# EAGLE board Breakouts3-Panel (EAGLE 9.6.2)
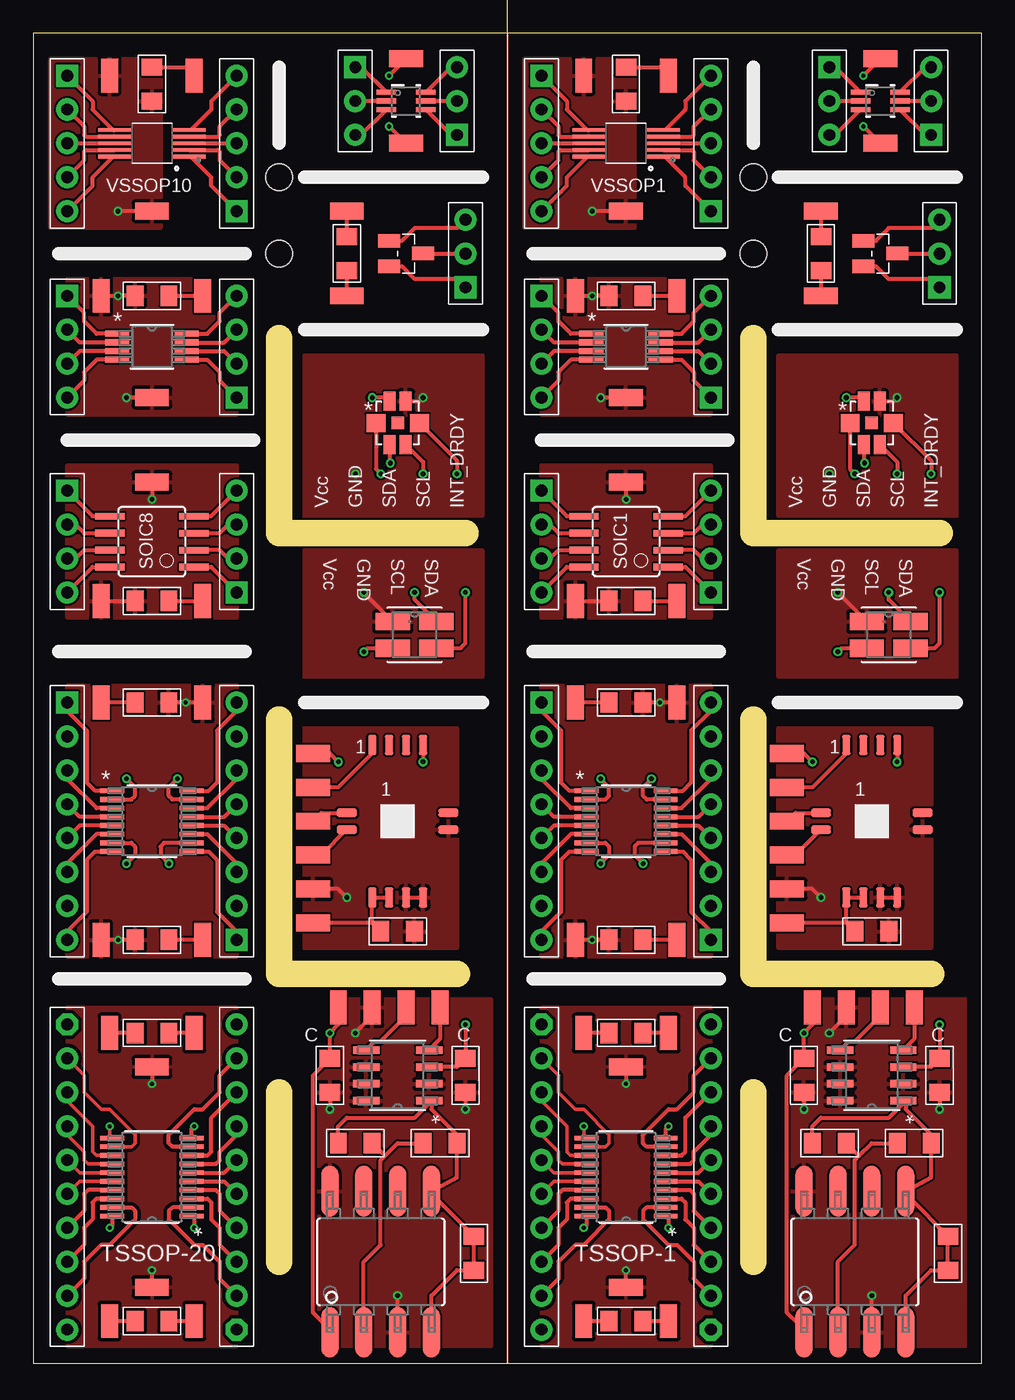
[diagram p0: board, top side]
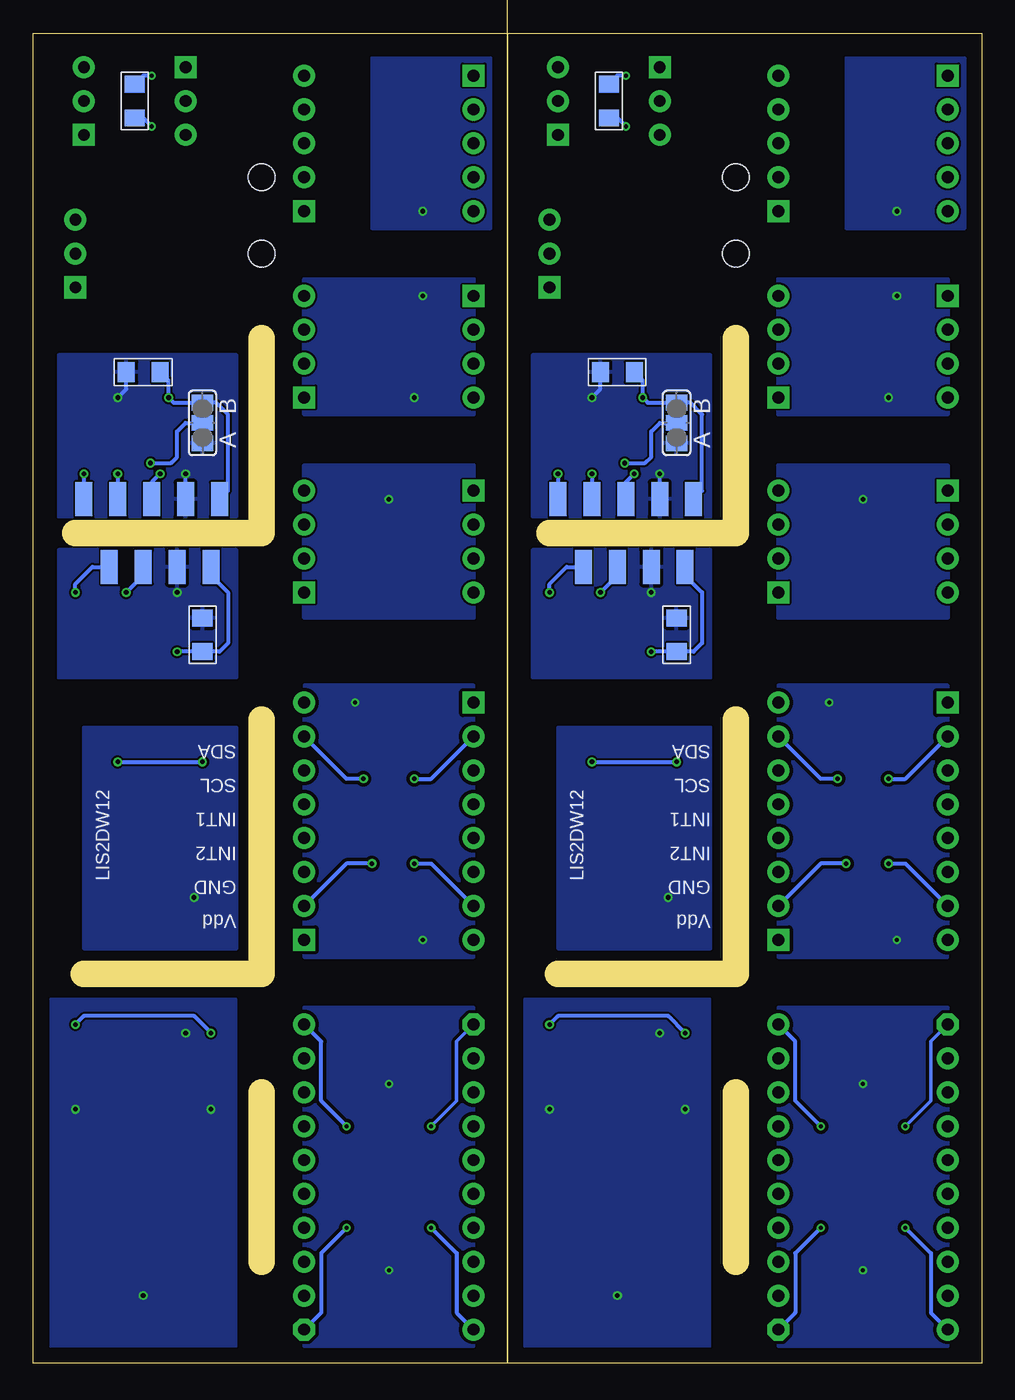
[diagram p1: board, bottom side, seen from below]

Size 71.08 x 99.69 mm. Coordinates in mm from the lower left corner, seen from the top.
Outline: 35.54,0 0,0 0,99.69 35.54,99.69
Outline: 35.54,0 35.54,99.69
Outline: 35.54,0 71.08,0 71.08,99.69 35.54,99.69
Outline: 35.54,99.69 35.54,0
Copper layers (1*16): Top 0.035mm / dielectric 1.5mm / Bottom 0.035mm
Design rules "Seeed Fusion_eagle_rule_v1.1": minimum track width 6mil, minimum drill 12mil, track to track 6mil, track to pad 6mil, pad to pad 6mil, via to via 6mil, smd to smd 0mil, copper to edge 10mil, drill to drill 10mil, minimum pad ring 10mil, minimum via ring 6mil, stop-mask expansion 2mil, vias tented up to drill 100mil, thermal gap 10mil
Holes 2 mm at 18.41,83.19 18.41,88.9 53.95,83.19 53.95,88.9
Milling: 11 lines

## Footprints (pad centres in the part's own frame; a part is rotated, then mirrored left to right if it is on the bottom)
1206 = smd 1.27 x 1.524: 1 -1.27,0; 2 1.27,0
CCLGA7_LPS28DFW_LARGE = smd 1.422 x 1.346: 1 -1.626,0; 4 1.626,0 | smd 0.889 x 1.422: 2 -0.6,-1.626; 3 0.6,-1.626; 5 0.6,1.626; 6 -0.6,1.626 | smd 0.94 x 0.94: 7 0,0
10P-2.54 = drill 0.889 pad 1.651 octagon: 1 0,11.43 | drill 0.889 pad 1.651: 2 0,8.89; 3 0,6.35; 4 0,3.81; 5 0,1.27; 6 0,-1.27; 7 0,-3.81; 8 0,-6.35; 9 0,-8.89; 10 0,-11.43
4P-1.27-SMD = smd 1.524 x 0.635: 1 0,1.905; 2 0,0.635; 3 0,-0.635; 4 0,-1.905
8P-2.54 = drill 0.889 pad 1.651 square: 1 0,8.89 | drill 0.889 pad 1.651: 2 0,6.35; 3 0,3.81; 4 0,1.27; 5 0,-1.27; 6 0,-3.81; 7 0,-6.35; 8 0,-8.89
3P-2.54 = drill 0.889 pad 1.651 square: 1 0,2.54 | drill 0.889 pad 1.651: 2 0,0; 3 0,-2.54
4P-65/35MIL = drill 0.889 pad 1.651 square: 1 0,3.81 | drill 0.889 pad 1.651: 2 0,1.27; 3 0,-1.27; 4 0,-3.81
5P-2.54 = drill 0.889 pad 1.651 square: 1 0,5.08 | drill 0.889 pad 1.651: 2 0,2.54; 3 0,0; 4 0,-2.54; 5 0,-5.08
MSOP8_MC_MCH-M = smd 1.829 x 0.457: 1 -2.603,0.975; 2 -2.603,0.325; 3 -2.603,-0.325; 4 -2.603,-0.975; 5 2.603,-0.975; 6 2.603,-0.325; 7 2.603,0.325; 8 2.603,0.975
SMD1,27-2,54 = smd 1.27 x 2.54: 1 0,0
SOT23_LONG = smd 1.016 x 1.651: 1 -0.95,-1.27; 2 0.95,-1.27; 3 0,1.27
SJ_2 = smd 1.168 x 1.6: 1 -1.524,0; 2 0,0; 3 1.524,0
SOIC8 = smd 0.5 x 2.2: 1 -1.905,-3.154; 2 -0.645,-3.154; 3 0.625,-3.154; 4 1.895,-3.154; 5 1.905,3.154; 6 0.635,3.154; 7 -0.635,3.154; 8 -1.905,3.154
PW20-M = smd 1.778 x 0.356: 1 -2.972,2.925; 2 -2.972,2.275; 3 -2.972,1.625; 4 -2.972,0.975; 5 -2.972,0.325; 6 -2.972,-0.325; 7 -2.972,-0.975; 8 -2.972,-1.625; 9 -2.972,-2.275; 10 -2.972,-2.925; 11 2.972,-2.925; 12 2.972,-2.275; 13 2.972,-1.625; 14 2.972,-0.975; 15 2.972,-0.325; 16 2.972,0.325; 17 2.972,0.975; 18 2.972,1.625; 19 2.972,2.275; 20 2.972,2.925
SOT403-1_NXP-M = smd 1.778 x 0.356: 1 -2.972,2.275; 2 -2.972,1.625; 3 -2.972,0.975; 4 -2.972,0.325; 5 -2.972,-0.325; 6 -2.972,-0.975; 7 -2.972,-1.625; 8 -2.972,-2.275; 9 2.972,-2.275; 10 2.972,-1.625; 11 2.972,-0.975; 12 2.972,-0.325; 13 2.972,0.325; 14 2.972,0.975; 15 2.972,1.625; 16 2.972,2.275
MS5837-02BA01_LARGE = smd 2.565 x 1.295: 1 -1.635,1; 2 -1.635,-1; 3 1.635,-1; 4 1.635,1
DRV0006B-LARGE = smd 1.466 x 0.381: 1 -1.483,0.65; 2 -1.483,0; 3 -1.483,-0.65; 4 1.483,-0.65; 5 1.483,0; 6 1.483,0.65
DTL0008A_LARGE = smd 3.81 x 1.27: 1 -5.283,3.81; 2 -5.283,1.27; 3 -5.283,-1.27; 4 -5.283,-3.81; 5 5.283,-3.81; 6 5.283,-1.27; 7 5.283,1.27; 8 5.283,3.81
SOIC8-N_MC_MCH = smd 1.981 x 0.559: 1 -2.362,1.905; 2 -2.362,0.635; 3 -2.362,-0.635; 4 -2.362,-1.905; 5 2.362,-1.905; 6 2.362,-0.635; 7 2.362,0.635; 8 2.362,1.905
2P-1.27-SMD = smd 1.524 x 0.635: 1 0,0.635; 2 0,-0.635
SOP50P490X110-10N = smd 2.54 x 0.28: 1 -2.794,1; 2 -2.794,0.5; 3 -2.794,0; 4 -2.794,-0.5; 5 -2.794,-1; 6 2.794,-1; 7 2.794,-0.5; 8 2.794,0; 9 2.794,0.5; 10 2.794,1

## Placement (x,y rotation side)
C1  [1206]  27.3,32.38 180 top
C2  [1206]  22.86,54.61 270 bottom
C3  [1206]  8.89,24.77 0 top
C4  [1206]  8.89,3.17 0 top
C5  [1206]  32.38,21.59 270 top
C6  [1206]  27.94,94.61 90 bottom
C7  [1206]  8.89,31.75 0 top
C8  [1206]  8.89,49.53 0 top
C9  [1206]  22.23,21.59 270 top
C10  [1206]  24.13,16.51 0 top
C11  [1206]  8.89,57.15 0 top
C12  [1206]  8.89,80.01 0 top
C13  [1206]  8.89,95.89 90 top
C14  [1206]  27.3,74.3 0 bottom
C15  [1206]  62.84,32.38 180 top
C16  [1206]  58.4,54.61 270 bottom
C17  [1206]  44.43,24.77 0 top
C18  [1206]  44.43,3.17 0 top
C19  [1206]  67.92,21.59 270 top
C20  [1206]  63.48,94.61 90 bottom
C21  [1206]  44.43,31.75 0 top
C22  [1206]  44.43,49.53 0 top
C23  [1206]  57.76,21.59 270 top
C24  [1206]  59.67,16.51 0 top
C25  [1206]  44.43,57.15 0 top
C26  [1206]  44.43,80.01 0 top
C27  [1206]  62.84,74.3 0 bottom
C28  [1206]  44.43,95.89 90 top
CLGA-1  LPS28DFW  [CCLGA7_LPS28DFW_LARGE]  62.84,70.48 0 top
CLGA-7  LPS28DFW  [CCLGA7_LPS28DFW_LARGE]  27.3,70.48 0 top
J1  [10P-2.54]  15.24,13.97 180 top
J2  [10P-2.54]  2.54,13.97 0 top
J3  [4P-1.27-SMD]  27.3,46.35 90 top
J4  [4P-1.27-SMD]  27.3,34.92 270 top
J5  [8P-2.54]  15.24,40.64 180 top
J6  [8P-2.54]  2.54,40.64 0 top
J7  [3P-2.54]  31.75,94.61 180 top
J8  [3P-2.54]  24.13,94.61 0 top
J9  [4P-65/35MIL]  2.54,61.59 0 top
J10  [4P-65/35MIL]  15.24,61.59 180 top
J11  [4P-65/35MIL]  15.24,76.2 180 top
J12  [4P-65/35MIL]  2.54,76.2 0 top
J13  [3P-2.54]  32.38,83.19 180 top
J14  [5P-2.54]  15.24,91.44 180 top
J15  [5P-2.54]  2.54,91.44 0 top
J16  [10P-2.54]  50.78,13.97 180 top
J17  [10P-2.54]  38.08,13.97 0 top
J18  [4P-1.27-SMD]  62.84,46.35 90 top
J19  [4P-1.27-SMD]  62.84,34.92 270 top
J20  [8P-2.54]  50.78,40.64 180 top
J21  [8P-2.54]  38.08,40.64 0 top
J22  [3P-2.54]  67.29,94.61 180 top
J23  [3P-2.54]  59.67,94.61 0 top
J24  [4P-65/35MIL]  38.08,61.59 0 top
J25  [4P-65/35MIL]  50.78,61.59 180 top
J26  [4P-65/35MIL]  50.78,76.2 180 top
J27  [4P-65/35MIL]  38.08,76.2 0 top
J28  [3P-2.54]  67.92,83.19 180 top
J29  [5P-2.54]  50.78,91.44 180 top
J30  [5P-2.54]  38.08,91.44 0 top
MSOP1  MCP4532-104E/MSMSOP8_MC_MCH-M  [MSOP8_MC_MCH-M]  44.43,76.2 0 top
MSOP8  MCP4532-104E/MSMSOP8_MC_MCH-M  [MSOP8_MC_MCH-M]  8.89,76.2 0 top
PAD1  WIREPADSMD1,27-254  [SMD1,27-2,54]  20.95,35.56 90 top
PAD2  WIREPADSMD1,27-254  [SMD1,27-2,54]  20.95,33.02 90 top
PAD3  WIREPADSMD1,27-254  [SMD1,27-2,54]  20.95,43.18 90 top
PAD4  WIREPADSMD1,27-254  [SMD1,27-2,54]  20.95,38.1 90 top
PAD5  WIREPADSMD1,27-254  [SMD1,27-2,54]  20.95,40.64 90 top
PAD6  WIREPADSMD1,27-254  [SMD1,27-2,54]  20.95,45.72 90 top
PAD7  WIREPADSMD1,27-254  [SMD1,27-2,54]  24.77,59.69 180 bottom
PAD8  WIREPADSMD1,27-254  [SMD1,27-2,54]  22.23,59.69 180 bottom
PAD9  WIREPADSMD1,27-254  [SMD1,27-2,54]  27.3,59.69 180 bottom
PAD10  WIREPADSMD1,27-254  [SMD1,27-2,54]  29.84,59.69 180 bottom
PAD11  WIREPADSMD1,27-254  [SMD1,27-2,54]  5.71,24.77 0 top
PAD12  WIREPADSMD1,27-254  [SMD1,27-2,54]  5.71,3.17 0 top
PAD13  WIREPADSMD1,27-254  [SMD1,27-2,54]  12.06,24.77 0 top
PAD14  WIREPADSMD1,27-254  [SMD1,27-2,54]  12.06,3.17 0 top
PAD15  WIREPADSMD1,27-254  [SMD1,27-2,54]  8.89,5.71 90 top
PAD16  WIREPADSMD1,27-254  [SMD1,27-2,54]  8.89,22.23 90 top
PAD17  WIREPADSMD1,27-254  [SMD1,27-2,54]  27.94,91.44 90 top
PAD18  WIREPADSMD1,27-254  [SMD1,27-2,54]  27.94,97.79 90 top
PAD19  WIREPADSMD1,27-254  [SMD1,27-2,54]  5.08,49.53 180 top
PAD20  WIREPADSMD1,27-254  [SMD1,27-2,54]  5.08,31.75 180 top
PAD21  WIREPADSMD1,27-254  [SMD1,27-2,54]  12.7,49.53 180 top
PAD22  WIREPADSMD1,27-254  [SMD1,27-2,54]  12.7,31.75 180 top
PAD23  WIREPADSMD1,27-254  [SMD1,27-2,54]  22.86,26.67 0 top
PAD24  WIREPADSMD1,27-254  [SMD1,27-2,54]  25.4,26.67 0 top
PAD25  WIREPADSMD1,27-254  [SMD1,27-2,54]  27.94,26.67 0 top
PAD26  WIREPADSMD1,27-254  [SMD1,27-2,54]  30.48,26.67 0 top
PAD27  WIREPADSMD1,27-254  [SMD1,27-2,54]  5.08,57.15 180 top
PAD28  WIREPADSMD1,27-254  [SMD1,27-2,54]  12.7,57.15 180 top
PAD29  WIREPADSMD1,27-254  [SMD1,27-2,54]  8.89,66.04 90 top
PAD30  WIREPADSMD1,27-254  [SMD1,27-2,54]  12.7,80.01 0 top
PAD31  WIREPADSMD1,27-254  [SMD1,27-2,54]  5.08,80.01 0 top
PAD32  WIREPADSMD1,27-254  [SMD1,27-2,54]  8.89,72.39 90 top
PAD33  WIREPADSMD1,27-254  [SMD1,27-2,54]  23.5,80.01 90 top
PAD34  WIREPADSMD1,27-254  [SMD1,27-2,54]  26.67,64.77 0 bottom
PAD35  WIREPADSMD1,27-254  [SMD1,27-2,54]  29.21,64.77 0 bottom
PAD36  WIREPADSMD1,27-254  [SMD1,27-2,54]  31.75,64.77 0 bottom
PAD37  WIREPADSMD1,27-254  [SMD1,27-2,54]  24.13,64.77 0 bottom
PAD38  WIREPADSMD1,27-254  [SMD1,27-2,54]  21.59,64.77 0 bottom
PAD39  WIREPADSMD1,27-254  [SMD1,27-2,54]  23.5,86.36 90 top
PAD40  WIREPADSMD1,27-254  [SMD1,27-2,54]  12.06,96.52 0 top
PAD41  WIREPADSMD1,27-254  [SMD1,27-2,54]  5.71,96.52 0 top
PAD42  WIREPADSMD1,27-254  [SMD1,27-2,54]  8.89,86.36 90 top
PAD43  WIREPADSMD1,27-254  [SMD1,27-2,54]  56.49,35.56 90 top
PAD44  WIREPADSMD1,27-254  [SMD1,27-2,54]  56.49,33.02 90 top
PAD45  WIREPADSMD1,27-254  [SMD1,27-2,54]  56.49,43.18 90 top
PAD46  WIREPADSMD1,27-254  [SMD1,27-2,54]  56.49,38.1 90 top
PAD47  WIREPADSMD1,27-254  [SMD1,27-2,54]  56.49,40.64 90 top
PAD48  WIREPADSMD1,27-254  [SMD1,27-2,54]  56.49,45.72 90 top
PAD49  WIREPADSMD1,27-254  [SMD1,27-2,54]  60.3,59.69 180 bottom
PAD50  WIREPADSMD1,27-254  [SMD1,27-2,54]  57.76,59.69 180 bottom
PAD51  WIREPADSMD1,27-254  [SMD1,27-2,54]  62.84,59.69 180 bottom
PAD52  WIREPADSMD1,27-254  [SMD1,27-2,54]  65.38,59.69 180 bottom
PAD53  WIREPADSMD1,27-254  [SMD1,27-2,54]  41.25,24.77 0 top
PAD54  WIREPADSMD1,27-254  [SMD1,27-2,54]  41.25,3.17 0 top
PAD55  WIREPADSMD1,27-254  [SMD1,27-2,54]  47.6,24.77 0 top
PAD56  WIREPADSMD1,27-254  [SMD1,27-2,54]  47.6,3.17 0 top
PAD57  WIREPADSMD1,27-254  [SMD1,27-2,54]  44.43,5.71 90 top
PAD58  WIREPADSMD1,27-254  [SMD1,27-2,54]  44.43,22.23 90 top
PAD59  WIREPADSMD1,27-254  [SMD1,27-2,54]  63.48,91.44 90 top
PAD60  WIREPADSMD1,27-254  [SMD1,27-2,54]  63.48,97.79 90 top
PAD61  WIREPADSMD1,27-254  [SMD1,27-2,54]  40.62,49.53 180 top
PAD62  WIREPADSMD1,27-254  [SMD1,27-2,54]  40.62,31.75 180 top
PAD63  WIREPADSMD1,27-254  [SMD1,27-2,54]  48.24,49.53 180 top
PAD64  WIREPADSMD1,27-254  [SMD1,27-2,54]  48.24,31.75 180 top
PAD65  WIREPADSMD1,27-254  [SMD1,27-2,54]  58.4,26.67 0 top
PAD66  WIREPADSMD1,27-254  [SMD1,27-2,54]  60.94,26.67 0 top
PAD67  WIREPADSMD1,27-254  [SMD1,27-2,54]  63.48,26.67 0 top
PAD68  WIREPADSMD1,27-254  [SMD1,27-2,54]  66.02,26.67 0 top
PAD69  WIREPADSMD1,27-254  [SMD1,27-2,54]  40.62,57.15 180 top
PAD70  WIREPADSMD1,27-254  [SMD1,27-2,54]  48.24,57.15 180 top
PAD71  WIREPADSMD1,27-254  [SMD1,27-2,54]  44.43,66.04 90 top
PAD72  WIREPADSMD1,27-254  [SMD1,27-2,54]  48.24,80.01 0 top
PAD73  WIREPADSMD1,27-254  [SMD1,27-2,54]  40.62,80.01 0 top
PAD74  WIREPADSMD1,27-254  [SMD1,27-2,54]  44.43,72.39 90 top
PAD75  WIREPADSMD1,27-254  [SMD1,27-2,54]  62.21,64.77 0 bottom
PAD76  WIREPADSMD1,27-254  [SMD1,27-2,54]  64.75,64.77 0 bottom
PAD77  WIREPADSMD1,27-254  [SMD1,27-2,54]  67.29,64.77 0 bottom
PAD78  WIREPADSMD1,27-254  [SMD1,27-2,54]  59.67,64.77 0 bottom
PAD79  WIREPADSMD1,27-254  [SMD1,27-2,54]  57.13,64.77 0 bottom
PAD80  WIREPADSMD1,27-254  [SMD1,27-2,54]  59.03,80.01 90 top
PAD81  WIREPADSMD1,27-254  [SMD1,27-2,54]  59.03,86.36 90 top
PAD82  WIREPADSMD1,27-254  [SMD1,27-2,54]  47.6,96.52 0 top
PAD83  WIREPADSMD1,27-254  [SMD1,27-2,54]  41.25,96.52 0 top
PAD84  WIREPADSMD1,27-254  [SMD1,27-2,54]  44.43,86.36 90 top
Q1  [SOT23_LONG]  27.94,83.19 270 top
Q2  [SOT23_LONG]  63.48,83.19 270 top
R1  [1206]  30.48,16.51 180 top
R2  [1206]  33.02,8.26 270 top
R3  [1206]  23.5,83.19 90 top
R4  [1206]  66.02,16.51 180 top
R5  [1206]  68.56,8.26 270 top
R6  [1206]  59.03,83.19 90 top
SJ1  [SJ_2]  22.86,70.48 90 bottom
SJ2  [SJ_2]  58.4,70.48 90 bottom
SOIC1  TINY10S  [SOIC8]  44.43,61.59 90 top
SOIC8  TINY10S  [SOIC8]  8.89,61.59 90 top
TSSOP-1  SN74ACT245PWRPW20-M  [PW20-M]  44.43,13.97 180 top
TSSOP-2  SC18IM704PWJSOT403-1_NXP-M  [SOT403-1_NXP-M]  44.43,40.64 0 top
TSSOP-16  SC18IM704PWJSOT403-1_NXP-M  [SOT403-1_NXP-M]  8.89,40.64 0 top
TSSOP-20  SN74ACT245PWRPW20-M  [PW20-M]  8.89,13.97 180 top
U1  MS5837  [MS5837-02BA01_LARGE]  28.57,54.61 0 top
U2  TMP117AIDRVRLARGE  [DRV0006B-LARGE]  27.94,94.61 0 top
U3  OPT101  [DTL0008A_LARGE]  26.04,7.62 90 top
U4  MCP3426  [SOIC8-N_MC_MCH]  27.3,21.59 180 top
U5  MS5837  [MS5837-02BA01_LARGE]  64.11,54.61 0 top
U6  TMP117AIDRVRLARGE  [DRV0006B-LARGE]  63.48,94.61 0 top
U7  OPT101  [DTL0008A_LARGE]  61.57,7.62 90 top
U8  MCP3426  [SOIC8-N_MC_MCH]  62.84,21.59 180 top
U$1  HEADER-2P  [2P-1.27-SMD]  31.11,40.64 0 top
U$2  HEADER-2P  [2P-1.27-SMD]  23.5,40.64 180 top
U$3  HEADER-2P  [2P-1.27-SMD]  66.65,40.64 0 top
U$4  HEADER-2P  [2P-1.27-SMD]  59.03,40.64 180 top
VSSOP1  FDC1004DGSR  [SOP50P490X110-10N]  44.43,91.44 180 top
VSSOP10  FDC1004DGSR  [SOP50P490X110-10N]  8.89,91.44 180 top

## Library data of the parts
C1-C28 PAD1-PAD84 Q1 Q2 R1-R6 SJ1 SJ2 = Master 2016
CLGA-1 CLGA-7 J3 J4 J18 J19 U1 U2 U5 U6 U$1-U$4 = SMD Breakouts
J1 J2 J5-J17 J20-J30 = Connector
MSOP1 MSOP8 = SMD Breakouts; COPYRIGHT: Copyright (C) 2025 Ultra Librarian. All rights reserved.; MANUFACTURER_PART_NUMBER: MCP4532-104E/MS; MFR_NAME: Microchip
SOIC1 SOIC8 = atmel; OC_FARNELL: unknown; OC_NEWARK: unknown
TSSOP-1 TSSOP-20 = SMD Breakouts; COPYRIGHT: Copyright (C) 2025 Ultra Librarian. All rights reserved.; MANUFACTURER_PART_NUMBER: SN74ACT245PWR; MFR_NAME: Texas Instruments
TSSOP-2 TSSOP-16 = SMD Breakouts; COPYRIGHT: Copyright (C) 2025 Ultra Librarian. All rights reserved.; MANUFACTURER_PART_NUMBER: SC18IM704PWJ; MFR_NAME: NXP
U3 U7 VSSOP1 VSSOP10 = ESP32 Projects
U4 U8 = ESP32 Projects; COPYRIGHT: Copyright (C) 2025 Ultra Librarian. All rights reserved.; MANUFACTURER_PART_NUMBER: MCP3426A0T-E/SN; MFR_NAME: Microchip

## Nets
AGND: PAD15.1 PAD16.1
AGND1: PAD57.1 PAD58.1
B1: J3.1 PAD3.1
B2: J3.2
B3: J3.3
B4: J3.4 PAD6.1
B5: U$1.1
B6: C1.1 J4.1 J4.2 PAD1.1 U$1.2
B7: C15.2 J19.3 J19.4 PAD44.1
B8: U$3.1
B9: C1.2 J4.3 J4.4 PAD2.1
B10: J18.1 PAD45.1
B11: PAD4.1 U$2.1
B12: PAD5.1 U$2.2
B13: J18.3
B14: C15.1 J19.1 J19.2 PAD43.1 U$3.2
B15: J18.4 PAD48.1
B16: PAD46.1 U$4.1
B17: PAD47.1 U$4.2
B18: J18.2
CGND: C2.1 PAD7.1 U1.1
CGND1: C16.1 PAD49.1 U5.1
D1: J8.1 U2.1
D2: J8.2 U2.2
D3: J8.3 U2.3
D4: J7.1 U2.4
D5: J7.2 U2.5
D6: J7.3 U2.6
D7: J22.2 U6.5
D8: J22.3 U6.6
D9: J23.1 U6.1
D10: J23.3 U6.3
D11: J22.1 U6.4
D12: J23.2 U6.2
EGND: C5.2 C9.2 PAD24.1 U3.3 U3.8 U4.2 U4.6 U4.7 U4.8
EGND1: C19.2 C23.2 PAD66.1 U7.3 U7.8 U8.2 U8.6 U8.7 U8.8
ESCL: PAD25.1 U4.5
ESCL1: PAD67.1 U8.5
ESDA: PAD26.1 U4.4
ESDA1: PAD68.1 U8.4
EV+: C5.1 C9.1 PAD23.1 U3.1 U4.3
EV+1: C19.1 C23.1 PAD65.1 U7.1 U8.3
FGND: C7.1 C8.2 PAD20.1 PAD21.1
FGND1: C21.1 C22.2 PAD62.1 PAD63.1
G1: J10.1 SOIC8.1
G2: J10.2 SOIC8.2
G3: J10.3 SOIC8.3
G4: J10.4 SOIC8.4
G5: J9.1 SOIC8.5
G6: J9.2 SOIC8.6
G7: J9.3 SOIC8.7
G8: J9.4 SOIC8.8
G9: J24.4 SOIC1.8
G10: J25.4 SOIC1.4
G11: J25.1 SOIC1.1
G12: J25.3 SOIC1.3
G13: J25.2 SOIC1.2
G14: J24.3 SOIC1.7
G15: J24.2 SOIC1.6
G16: J24.1 SOIC1.5
GGND: C11.1 PAD27.1 PAD29.1
GGND1: C25.1 PAD69.1 PAD71.1
HGND: C12.1 PAD31.1 PAD32.1
HGND1: C26.1 PAD73.1 PAD74.1
I1: CLGA-7.1 PAD34.1
I2: CLGA-7.2 SJ1.2
I3: CLGA-7.3 PAD35.1
I4: CLGA-7.4 PAD36.1
I5: CLGA-1.1 PAD75.1
I6: C14.2 CLGA-7.6 PAD38.1 SJ1.3
I7: CLGA-1.2 SJ2.2
I8: CLGA-1.3 PAD76.1
I9: CLGA-1.4 PAD77.1
I10: C27.2 CLGA-1.6 PAD79.1 SJ2.3
IGND: C14.1 CLGA-7.5 PAD37.1 SJ1.1
IGND1: C27.1 CLGA-1.5 PAD78.1 SJ2.1
J1: J14.1 VSSOP10.1
J2: J14.2 VSSOP10.2
J3: J14.3 VSSOP10.3
J4: J14.4 VSSOP10.4
J5: J14.5 VSSOP10.5
J6: J15.1 VSSOP10.6
J7: J15.2 VSSOP10.7
J8: J15.3 VSSOP10.8
J9: J15.4 VSSOP10.9
J10: J15.5 VSSOP10.10
J11: J30.1 VSSOP1.6
J12: J30.2 VSSOP1.7
J13: J30.3 VSSOP1.8
J14: J30.4 VSSOP1.9
J15: J30.5 VSSOP1.10
J16: J29.5 VSSOP1.5
J17: J29.4 VSSOP1.4
J18: J29.3 VSSOP1.3
J19: J29.2 VSSOP1.2
J20: J29.1 VSSOP1.1
JGND: C13.1 PAD41.1 PAD42.1
JGND1: C28.1 PAD83.1 PAD84.1
N$1: J1.1 TSSOP-20.1
N$2: C2.2 PAD8.1 U1.2
N$3: PAD9.1 U1.4
N$4: PAD10.1 U1.3
N$5: J1.2 TSSOP-20.2
N$6: J1.3 TSSOP-20.3
N$7: J1.4 TSSOP-20.4
N$8: J1.5 TSSOP-20.5
N$9: J1.6 TSSOP-20.6
N$10: J1.7 TSSOP-20.7
N$11: J1.8 TSSOP-20.8
N$12: J1.9 TSSOP-20.9
N$13: J1.10 TSSOP-20.10
N$14: J2.10 TSSOP-20.20
N$15: J2.9 TSSOP-20.19
N$16: J2.8 TSSOP-20.18
N$17: J2.7 TSSOP-20.17
N$18: J2.6 TSSOP-20.16
N$19: J2.5 TSSOP-20.15
N$20: J2.4 TSSOP-20.14
N$21: J2.3 TSSOP-20.13
N$22: J2.2 TSSOP-20.12
N$23: J2.1 TSSOP-20.11
N$24: C3.1 PAD11.1
N$25: C3.2 PAD13.1
N$26: C4.1 PAD12.1
N$27: C4.2 PAD14.1
N$28: C6.1 PAD17.1
N$29: C6.2 PAD18.1
N$30: C7.2 PAD22.1
N$31: PAD33.1 R3.1
N$32: C10.1 R1.1 R2.1 R2.2 U3.4 U3.5 U4.1
N$33: C8.1 PAD19.1
N$34: J6.1 TSSOP-16.1
N$35: J6.2 TSSOP-16.2
N$36: J6.3 TSSOP-16.3
N$37: J6.4 TSSOP-16.4
N$38: J6.5 TSSOP-16.5
N$39: J6.6 TSSOP-16.6
N$40: J6.7 TSSOP-16.7
N$41: J6.8 TSSOP-16.8
N$42: J5.8 TSSOP-16.16
N$43: J5.7 TSSOP-16.15
N$44: J5.6 TSSOP-16.14
N$45: J5.5 TSSOP-16.13
N$46: J5.4 TSSOP-16.12
N$47: J5.3 TSSOP-16.11
N$48: J5.2 TSSOP-16.10
N$49: J5.1 TSSOP-16.9
N$50: C10.2 R1.2 U3.2
N$51: C11.2 PAD28.1
N$52: J12.1 MSOP8.1
N$53: J12.2 MSOP8.2
N$54: J12.3 MSOP8.3
N$55: J12.4 MSOP8.4
N$56: J11.4 MSOP8.8
N$57: J11.3 MSOP8.7
N$58: J11.2 MSOP8.6
N$59: J11.1 MSOP8.5
N$60: PAD39.1 R3.2
N$61: C12.2 PAD30.1
N$62: J13.3 Q1.1
N$63: J13.2 Q1.3
N$64: J13.1 Q1.2
N$65: C16.2 PAD50.1 U5.2
N$66: C13.2 PAD40.1
N$67: PAD51.1 U5.4
N$68: PAD52.1 U5.3
N$69: J16.1 TSSOP-1.1
N$70: J16.2 TSSOP-1.2
N$71: J16.3 TSSOP-1.3
N$72: J16.4 TSSOP-1.4
N$73: J16.5 TSSOP-1.5
N$74: J16.6 TSSOP-1.6
N$75: J16.7 TSSOP-1.7
N$76: J16.8 TSSOP-1.8
N$77: J16.9 TSSOP-1.9
N$78: J16.10 TSSOP-1.10
N$79: J17.10 TSSOP-1.20
N$80: J17.9 TSSOP-1.19
N$81: J17.8 TSSOP-1.18
N$82: J17.7 TSSOP-1.17
N$83: J17.6 TSSOP-1.16
N$84: J17.5 TSSOP-1.15
N$85: J17.4 TSSOP-1.14
N$86: J17.3 TSSOP-1.13
N$87: J17.2 TSSOP-1.12
N$88: J17.1 TSSOP-1.11
N$89: C17.1 PAD53.1
N$90: C17.2 PAD55.1
N$91: C18.1 PAD54.1
N$92: C18.2 PAD56.1
N$93: C20.1 PAD59.1
N$94: C20.2 PAD60.1
N$95: C21.2 PAD64.1
N$96: C22.1 PAD61.1
N$97: J21.1 TSSOP-2.1
N$98: J21.2 TSSOP-2.2
N$99: J21.3 TSSOP-2.3
N$100: J21.4 TSSOP-2.4
N$101: J21.5 TSSOP-2.5
N$102: J21.6 TSSOP-2.6
N$103: J21.7 TSSOP-2.7
N$104: J21.8 TSSOP-2.8
N$105: J20.8 TSSOP-2.16
N$106: J20.7 TSSOP-2.15
N$107: J20.6 TSSOP-2.14
N$108: J20.5 TSSOP-2.13
N$109: J20.4 TSSOP-2.12
N$110: J20.3 TSSOP-2.11
N$111: J20.2 TSSOP-2.10
N$112: J20.1 TSSOP-2.9
N$113: C24.1 R4.1 R5.1 R5.2 U7.4 U7.5 U8.1
N$114: C24.2 R4.2 U7.2
N$115: C25.2 PAD70.1
N$116: J27.1 MSOP1.1
N$117: J27.2 MSOP1.2
N$118: J27.3 MSOP1.3
N$119: J27.4 MSOP1.4
N$120: J26.4 MSOP1.8
N$121: J26.3 MSOP1.7
N$122: J26.2 MSOP1.6
N$123: J26.1 MSOP1.5
N$124: C26.2 PAD72.1
N$125: PAD80.1 R6.1
N$126: PAD81.1 R6.2
N$127: J28.1 Q2.2
N$128: J28.3 Q2.1
N$129: J28.2 Q2.3
N$130: C28.2 PAD82.1

## Tracks (layer width: path | path; a pad name or v marks a point on that pad's centre or on a via)
AGND  (via drill 0.3 pad 0.61)
  Top 0.305: PAD15.1 v8.89,6.99 | PAD16.1 v8.89,20.95
  pour Bottom (isolate 0.254): 2.54,26.67 15.24,26.67 15.24,1.27 2.54,1.27
  pour Top (isolate 0.254): 2.54,26.67 2.54,1.27 15.24,1.27 15.24,26.67
AGND1  (via drill 0.3 pad 0.61)
  Top 0.305: PAD57.1 v44.43,6.99 | PAD58.1 v44.43,20.95
  pour Bottom (isolate 0.254): 38.08,26.67 50.78,26.67 50.78,1.27 38.08,1.27
  pour Top (isolate 0.254): 38.08,26.67 38.08,1.27 50.78,1.27 50.78,26.67
B1
  Top 0.305: J3.1 25.4,45.72 22.86,43.18 PAD3.1
B4  (via drill 0.35)
  Top 0.305: J3.4 v29.21,45.09 | v22.86,45.09 22.23,45.72 PAD6.1
  Bottom 0.305: v29.21,45.09 v22.86,45.09
B6  (via drill 0.35)
  Top 0.305: J4.2 J4.1 | v23.5,34.92 22.86,35.56 PAD1.1
  pour Bottom: 20.32,47.62 31.75,47.62 31.75,31.11 20.32,31.11
  pour Top: 20.32,47.62 31.75,47.62 31.75,31.11 20.32,31.11
B7
  Top 0.305: J19.3 J19.4 60.94,33.02 | 60.94,33.02 PAD44.1 | C15.2 60.94,33.02
B9
  Top 0.305: J4.3 J4.4 25.4,33.02 | 25.4,33.02 PAD2.1 | C1.2 25.4,33.02
B10
  Top 0.305: J18.1 60.94,45.72 58.4,43.18 PAD45.1
B11
  Top 0.305: PAD4.1 21.59,38.1 U$2.1
B12
  Top 0.305: PAD5.1 21.59,41.27 U$2.2
B14  (via drill 0.35)
  Top 0.305: J19.2 J19.1 | v59.03,34.92 58.4,35.56 PAD43.1
  pour Bottom: 55.86,47.62 67.29,47.62 67.29,31.11 55.86,31.11
  pour Top: 55.86,47.62 67.29,47.62 67.29,31.11 55.86,31.11
B15  (via drill 0.35)
  Top 0.305: J18.4 v64.75,45.09 | v58.4,45.09 57.77,45.72 PAD48.1
  Bottom 0.305: v64.75,45.09 v58.4,45.09
B16
  Top 0.305: PAD46.1 57.13,38.1 U$4.1
B17
  Top 0.305: PAD47.1 57.13,41.27 U$4.2
CGND  (via drill 0.35)
  Top 0.305: v24.77,57.78 U1.1
  pour Bottom: 33.66,60.96 33.66,51.44 20.32,51.44 20.32,60.96
  pour Top: 33.66,60.96 33.66,51.44 20.32,51.44 20.32,60.96
CGND1  (via drill 0.35)
  Top 0.305: v60.3,57.78 U5.1
  pour Bottom: 69.19,60.96 69.19,51.44 55.86,51.44 55.86,60.96
  pour Top: 69.19,60.96 69.19,51.44 55.86,51.44 55.86,60.96
D1
  Top 0.305: U2.1 24.57,97.16 J8.1
D2
  Top 0.305: U2.2 J8.2
D3
  Top 0.305: U2.3 24.57,92.08 J8.3
D4
  Top 0.305: U2.4 31.31,92.08 J7.1
D5
  Top 0.305: J7.2 U2.5
D6
  Top 0.305: U2.6 31.31,97.16 J7.3
D7
  Top 0.305: J22.2 U6.5
D8
  Top 0.305: U6.6 66.85,97.16 J22.3
D9
  Top 0.305: U6.1 60.11,97.16 J23.1
D10
  Top 0.305: U6.3 60.11,92.08 J23.3
D11
  Top 0.305: U6.4 66.85,92.08 J22.1
D12
  Top 0.305: U6.2 J23.2
EGND  (via drill 0.35)
  Top 0.305: C5.2 v32.38,19.05 | C9.2 v22.23,19.05 | PAD24.1 25.4,26.04 v24.13,24.77 | U3.3 v27.3,5.08
  pour Bottom: 20.32,27.3 34.29,27.3 34.29,1.27 20.32,1.27
  pour Top: 20.32,27.3 34.29,27.3 34.29,1.27 20.32,1.27
EGND1  (via drill 0.35)
  Top 0.305: C19.2 v67.92,19.05 | C23.2 v57.77,19.05 | PAD66.1 60.94,26.04 v59.67,24.77 | U7.3 v62.84,5.08
  pour Bottom: 55.86,27.3 69.83,27.3 69.83,1.27 55.86,1.27
  pour Top: 55.86,27.3 69.83,27.3 69.83,1.27 55.86,1.27
ESCL
  Top 0.305: U4.5 25.58,24.13 26.04,24.13 27.94,26.04 PAD25.1
ESCL1
  Top 0.305: U8.5 61.12,24.13 61.58,24.13 63.48,26.04 PAD67.1
ESDA
  Top 0.305: PAD26.1 30.48,24.31 U4.4
ESDA1
  Top 0.305: PAD68.1 66.02,24.31 U8.4
EV+  (via drill 0.35)
  Top 0.305: U4.3 31.75,22.23 C5.1 v32.38,25.4 | PAD23.1 22.86,25.4 v22.23,24.77 C9.1 20.95,21.59 20.95,3.81 21.84,2.92 U3.1
  Bottom 0.305: v22.23,24.77 23.5,26.04 31.75,26.04 v32.38,25.4
EV+1  (via drill 0.35)
  Top 0.305: U8.3 67.29,22.23 C19.1 v67.92,25.4 | PAD65.1 58.4,25.4 v57.77,24.77 C23.1 56.49,21.59 56.49,3.81 57.38,2.92 U7.1
  Bottom 0.305: v57.77,24.77 59.03,26.04 67.29,26.04 v67.92,25.4
FGND  (via drill 0.3 pad 0.61)
  Top 0.305: C8.2 v11.43,49.53 PAD21.1 | PAD20.1 v6.35,31.75 C7.1
  pour Bottom (isolate 0.254): 2.54,50.8 15.24,50.8 15.24,30.48 2.54,30.48
  pour Top: 2.54,50.8 15.24,50.8 15.24,30.48 2.54,30.48
FGND1  (via drill 0.3 pad 0.61)
  Top 0.305: C22.2 v46.97,49.53 PAD63.1 | PAD62.1 v41.89,31.75 C21.1
  pour Bottom (isolate 0.254): 38.08,50.8 50.78,50.8 50.78,30.48 38.08,30.48
  pour Top: 38.08,50.8 50.78,50.8 50.78,30.48 38.08,30.48
G1
  Top 0.305: SOIC8.1 13.34,59.69 J10.1
G2
  Top 0.305: J10.2 14.61,60.33 13.97,60.96 12.05,60.96 SOIC8.2
G3
  Top 0.305: SOIC8.3 13.96,62.22 14.61,62.87 J10.3
G4
  Top 0.305: SOIC8.4 13.32,63.49 J10.4
G5
  Top 0.305: J9.1 4.45,63.5 SOIC8.5
G6
  Top 0.305: J9.2 3.17,62.87 3.81,62.23 SOIC8.6
G7
  Top 0.305: J9.3 3.17,60.33 3.81,60.96 SOIC8.7
G8
  Top 0.305: J9.4 4.45,59.69 SOIC8.8
G9
  Top 0.305: J24.4 39.98,59.69 SOIC1.8
G10
  Top 0.305: SOIC1.4 48.87,63.49 J25.4
G11
  Top 0.305: SOIC1.1 48.88,59.69 J25.1
G12
  Top 0.305: SOIC1.3 49.5,62.22 50.15,62.87 J25.3
G13
  Top 0.305: J25.2 50.15,60.33 49.51,60.96 47.59,60.96 SOIC1.2
G14
  Top 0.305: J24.3 38.72,60.33 39.35,60.96 SOIC1.7
G15
  Top 0.305: J24.2 38.72,62.87 39.35,62.23 SOIC1.6
G16
  Top 0.305: J24.1 39.98,63.5 SOIC1.5
GGND  (via drill 0.35)
  Top 0.305: PAD29.1 v8.89,64.77 | PAD27.1 C11.1
  pour Bottom: 2.54,67.31 2.54,55.88 15.24,55.88 15.24,67.31
  pour Top: 2.54,67.31 15.24,67.31 15.24,55.88 2.54,55.88
GGND1  (via drill 0.35)
  Top 0.305: PAD71.1 v44.43,64.77 | PAD69.1 C25.1
  pour Bottom: 38.08,67.31 38.08,55.88 50.78,55.88 50.78,67.31
  pour Top: 38.08,67.31 50.78,67.31 50.78,55.88 38.08,55.88
HGND  (via drill 0.35)
  Top 0.305: PAD32.1 v6.99,72.39 | C12.1 v6.35,80.01 PAD31.1
  pour Top: 2.54,81.28 2.54,71.12 15.24,71.12 15.24,81.28
  pour Bottom: 2.54,81.28 2.54,71.12 15.24,71.12 15.24,81.28
HGND1  (via drill 0.35)
  Top 0.305: PAD74.1 v42.52,72.39 | C26.1 v41.89,80.01 PAD73.1
  pour Top: 38.08,81.28 38.08,71.12 50.78,71.12 50.78,81.28
  pour Bottom: 38.08,81.28 38.08,71.12 50.78,71.12 50.78,81.28
I1  (via drill 0.35)
  Top 0.305: CLGA-7.1 25.68,67.03 v26.04,66.67
  Bottom 0.305: v26.04,66.67 26.67,66.04 PAD34.1
I2  (via drill 0.35)
  Top 0.305: CLGA-7.2 26.7,67.53 v26.76,67.48
  Bottom 0.305: v26.76,67.48 25.23,67.48 24.77,67.94 24.77,69.85 24.13,70.48 SJ1.2
I3  (via drill 0.35)
  Top 0.305: CLGA-7.3 29.21,67.56 v29.21,66.67
  Bottom 0.305: v29.21,66.67 PAD35.1
I4  (via drill 0.35)
  Top 0.305: CLGA-7.4 31.75,67.67 v31.75,66.67
  Bottom 0.305: v31.75,66.67 PAD36.1
I5  (via drill 0.35)
  Top 0.305: CLGA-1.1 61.22,67.03 v61.58,66.67
  Bottom 0.305: v61.58,66.67 62.21,66.04 PAD75.1
I6  (via drill 0.35)
  Top 0.305: CLGA-7.6 26.43,72.39 v25.4,72.39
  Bottom 0.305: C14.2 25.4,73.66 v25.4,72.39 25.02,72.01 SJ1.3 21.84,72.01 20.95,71.12 20.95,65.41 PAD38.1
I7  (via drill 0.35)
  Top 0.305: CLGA-1.2 62.24,67.53 v62.3,67.48
  Bottom 0.305: v62.3,67.48 60.77,67.48 60.3,67.94 60.3,69.85 59.67,70.48 SJ2.2
I8  (via drill 0.35)
  Top 0.305: CLGA-1.3 64.75,67.56 v64.75,66.67
  Bottom 0.305: v64.75,66.67 PAD76.1
I9  (via drill 0.35)
  Top 0.305: CLGA-1.4 67.29,67.67 v67.29,66.67
  Bottom 0.305: v67.29,66.67 PAD77.1
I10  (via drill 0.35)
  Top 0.305: CLGA-1.6 61.97,72.39 v60.94,72.39
  Bottom 0.305: C27.2 60.94,73.66 v60.94,72.39 60.56,72.01 SJ2.3 57.38,72.01 56.49,71.12 56.49,65.41 PAD79.1
IGND  (via drill 0.35)
  Top 0.305: CLGA-7.5 28.93,72.11 v29.21,72.39
  Bottom 0.305: v29.21,72.39 28.57,73.03 C14.1 | PAD37.1 v24.13,66.67
  pour Bottom: 20.32,63.5 20.32,75.56 33.66,75.56 33.66,63.5
  pour Top: 20.32,75.56 33.66,75.56 33.66,63.5 20.32,63.5
IGND1  (via drill 0.35)
  Top 0.305: CLGA-1.5 64.47,72.11 v64.75,72.39
  Bottom 0.305: v64.75,72.39 64.11,73.03 C27.1 | PAD78.1 v59.67,66.67
  pour Bottom: 55.86,63.5 55.86,75.56 69.19,75.56 69.19,63.5
  pour Top: 55.86,75.56 69.19,75.56 69.19,63.5 55.86,63.5
J1
  Top 0.305: J14.1 13.34,88.27 13.34,88.9 11.79,90.44 VSSOP10.1
J2
  Top 0.305: VSSOP10.2 13.84,90.94 13.97,90.81 13.97,90.17 J14.2
J3
  Top 0.305: VSSOP10.3 J14.3
J4
  Top 0.305: VSSOP10.4 13.84,91.94 13.97,92.08 13.97,92.71 J14.4
J5
  Top 0.305: J14.5 13.34,94.61 13.34,93.98 11.79,92.44 VSSOP10.5
J6
  Top 0.305: J15.1 4.45,94.61 4.45,93.98 5.99,92.44 VSSOP10.6
J7
  Top 0.305: J15.2 3.81,92.71 3.81,92.08 3.94,91.94 VSSOP10.7
J8
  Top 0.305: J15.3 VSSOP10.8
J9
  Top 0.305: J15.4 3.81,90.17 3.81,90.81 3.94,90.94 VSSOP10.9
J10
  Top 0.305: J15.5 4.45,88.27 4.45,88.9 5.99,90.44 VSSOP10.10
J11
  Top 0.305: J30.1 39.98,94.61 39.98,93.98 41.52,92.44 VSSOP1.6
J12
  Top 0.305: J30.2 39.35,92.71 39.35,92.08 39.48,91.94 VSSOP1.7
J13
  Top 0.305: J30.3 VSSOP1.8
J14
  Top 0.305: J30.4 39.35,90.17 39.35,90.81 39.48,90.94 VSSOP1.9
J15
  Top 0.305: J30.5 39.98,88.27 39.98,88.9 41.52,90.44 VSSOP1.10
J16
  Top 0.305: J29.5 48.88,94.61 48.88,93.98 47.34,92.44 VSSOP1.5
J17
  Top 0.305: VSSOP1.4 49.38,91.94 49.51,92.08 49.51,92.71 J29.4
J18
  Top 0.305: VSSOP1.3 J29.3
J19
  Top 0.305: VSSOP1.2 49.38,90.94 49.51,90.81 49.51,90.17 J29.2
J20
  Top 0.305: J29.1 48.88,88.27 48.88,88.9 47.34,90.44 VSSOP1.1
JGND  (via drill 0.35)
  Top 0.305: PAD42.1 v6.35,86.36
  pour Bottom: 1.27,97.79 10.16,97.79 10.16,85.09 1.27,85.09
  pour Top: 1.27,97.79 9.53,97.79 9.53,85.09 1.27,85.09
JGND1  (via drill 0.35)
  Top 0.305: PAD84.1 v41.89,86.36
  pour Bottom: 36.81,97.79 45.7,97.79 45.7,85.09 36.81,85.09
  pour Top: 36.81,97.79 45.06,97.79 45.06,85.09 36.81,85.09
N$1  (via drill 0.3 pad 0.61)
  Top 0.305: TSSOP-20.1 12.06,10.84 v12.06,10.16
  Bottom 0.305: v12.06,10.16 13.97,8.26 13.97,3.81 J1.1
N$2  (via drill 0.35)
  Top 0.305: v24.77,53.34 25.04,53.61 U1.2
  Bottom 0.305: PAD8.1 22.23,59.05 20.95,57.78 20.95,53.98 21.59,53.34 C2.2 v24.77,53.34
N$3  (via drill 0.35)
  Top 0.305: U1.4 28.57,57.24 v28.57,57.78
  Bottom 0.305: v28.57,57.78 27.3,59.05 PAD9.1
N$4  (via drill 0.35)
  Top 0.305: U1.3 32.02,53.61 32.38,53.98 v32.38,57.78
  Bottom 0.305: v32.38,57.78 32.38,58.42 31.11,59.69 PAD10.1
N$5
  Top 0.305: TSSOP-20.2 10.43,11.7 10.16,11.43 10.16,10.79 12.06,8.89 12.7,8.89 13.97,7.62 13.97,6.35 J1.2
N$6
  Top 0.305: TSSOP-20.3 13.05,12.35 13.34,12.06 13.34,10.79 13.97,10.16 13.97,8.89 J1.3
N$7
  Top 0.305: TSSOP-20.4 13.68,12.99 13.97,12.7 13.97,11.43 J1.4
N$8
  Top 0.305: TSSOP-20.5 14.29,13.64 J1.5
N$9
  Top 0.305: TSSOP-20.6 14.29,14.29 J1.6
N$10
  Top 0.305: TSSOP-20.7 13.68,14.95 13.97,15.24 13.97,15.88 15.24,17.14 J1.7
N$11
  Top 0.305: TSSOP-20.8 13.05,15.6 13.34,15.88 13.34,18.41 J1.8
N$12
  Top 0.305: TSSOP-20.9 10.43,16.25 10.16,16.51 10.16,17.14 12.06,19.05 12.7,19.05 13.97,20.32 13.97,21.59 J1.9
N$13  (via drill 0.3 pad 0.61)
  Top 0.305: TSSOP-20.10 11.86,17.58 v12.06,17.78
  Bottom 0.305: v12.06,17.78 13.97,19.68 13.97,24.13 J1.10
N$14  (via drill 0.3 pad 0.61)
  Top 0.305: TSSOP-20.20 5.92,10.36 v5.71,10.16
  Bottom 0.305: v5.71,10.16 3.81,8.26 3.81,3.81 J2.10
N$15
  Top 0.305: TSSOP-20.19 7.36,11.7 7.62,11.43 7.62,10.79 5.71,8.89 5.08,8.89 3.81,7.62 3.81,6.35 J2.9
N$16
  Top 0.305: TSSOP-20.18 4.72,12.35 4.45,12.06 4.45,10.79 3.81,10.16 3.81,8.89 J2.8
N$17
  Top 0.305: TSSOP-20.17 4.11,12.99 3.81,12.7 3.81,11.43 J2.7
N$18
  Top 0.254: TSSOP-20.16 3.48,13.64 J2.6
N$19
  Top 0.254: TSSOP-20.15 3.48,14.29 J2.5
N$20
  Top 0.254: TSSOP-20.14 4.11,14.95 3.81,15.24 3.81,15.88 2.54,17.14 J2.4
N$21
  Top 0.254: TSSOP-20.13 4.72,15.6 4.45,15.88 4.45,17.78 2.54,19.68 J2.3
N$22
  Top 0.254: TSSOP-20.12 7.36,16.25 7.62,16.51 7.62,17.14 5.71,19.05 5.08,19.05 3.81,20.32 3.81,21.59 J2.2
N$23  (via drill 0.3 pad 0.61)
  Top 0.254: TSSOP-20.11 5.71,17.1 v5.71,17.78
  Bottom 0.254: v5.71,17.78 3.81,19.68 3.81,24.13 J2.1
N$24
  Top 0.305: C3.1 PAD11.1
N$25
  Top 0.305: PAD13.1 C3.2
N$26
  Top 0.305: C4.1 PAD12.1
N$27
  Top 0.305: PAD14.1 C4.2
N$28  (via drill 0.3 pad 0.61)
  Top 0.305: PAD17.1 v26.67,92.71
  Bottom 0.305: v26.67,92.71 27.3,93.34 C6.1
N$29  (via drill 0.3 pad 0.61)
  Top 0.305: PAD18.1 v26.67,96.52
  Bottom 0.305: v26.67,96.52 27.3,96.52 C6.2
N$30
  Top 0.305: PAD22.1 C7.2
N$31
  Top 0.305: R3.1 PAD33.1
N$32
  Top 0.305: U3.4 29.84,5.08 31.75,6.99 R2.2 R2.1 30.23,12.32 U3.5 31.75,13.93 R1.1 31.75,17.14 29.84,19.05 29.84,19.51 U4.1 29.67,19.51 28.57,18.41 23.5,18.41 22.86,17.78 C10.1
N$33
  Top 0.305: C8.1 PAD19.1
N$34
  Top 0.305: J6.1 2.54,48.9 4.01,47.42 4.01,43.55 4.65,42.91 TSSOP-16.1
N$35  (via drill 0.35)
  Top 0.305: TSSOP-16.2 7.34,42.27 7.62,42.55 7.62,43.18 v6.99,43.81
  Bottom 0.305: v6.99,43.81 5.71,43.81 J6.2
N$36
  Top 0.254: J6.3 2.54,43.81
  Top 0.305: TSSOP-16.3 4.74,41.62 2.54,43.81
N$37
  Top 0.305: TSSOP-16.4 3.48,40.97 J6.4
N$38
  Top 0.305: TSSOP-16.5 3.48,40.31 J6.5
N$39
  Top 0.305: TSSOP-16.6 4.74,39.66 2.54,37.47 J6.6
N$40  (via drill 0.35)
  Top 0.305: TSSOP-16.7 7.34,39.02 7.62,38.73 7.62,38.1 v6.99,37.47
  Bottom 0.305: v6.99,37.47 5.71,37.47 J6.7
N$41
  Top 0.305: TSSOP-16.8 4.65,38.37 4.01,37.73 4.01,33.86 2.54,32.38 J6.8
N$42
  Top 0.305: J5.8 15.24,48.9 13.77,47.42 13.77,43.55 13.13,42.91 TSSOP-16.16
N$43  (via drill 0.35)
  Top 0.305: TSSOP-16.15 10.44,42.27 10.16,42.55 10.16,43.18 v10.79,43.81
  Bottom 0.305: v10.79,43.81 12.06,43.81 J5.7
N$44
  Top 0.305: TSSOP-16.14 13.04,41.62 15.24,43.81 J5.6
N$45
  Top 0.305: TSSOP-16.13 14.29,40.97 J5.5
N$46
  Top 0.305: TSSOP-16.12 14.29,40.31 J5.4
N$47
  Top 0.305: TSSOP-16.11 13.04,39.66 15.24,37.47 J5.3
N$48  (via drill 0.35)
  Top 0.305: TSSOP-16.10 9.8,39.02 9.53,38.73 9.53,38.1 v10.16,37.47
  Bottom 0.305: J5.2 12.06,37.47 v10.16,37.47
N$49
  Top 0.305: J5.1 15.24,32.38 13.77,33.86 13.77,37.73 13.13,38.37 TSSOP-16.9
N$50
  Top 0.305: U3.2 24.77,7.62 26.04,8.89 26.04,15.24 26.35,15.56 | 26.35,15.56 C10.2 | 26.35,15.56 27.3,16.51 R1.2
N$51
  Top 0.305: C11.2 PAD28.1
N$52
  Top 0.305: MSOP8.1 4.74,77.17 3.81,78.11 3.81,78.74 J12.1
N$53
  Top 0.305: MSOP8.2 3.48,76.53 J12.2
N$54
  Top 0.305: MSOP8.3 3.48,75.88 J12.3
N$55
  Top 0.305: MSOP8.4 4.74,75.22 3.81,74.3 3.81,73.66 J12.4
N$56
  Top 0.305: MSOP8.8 13.04,77.17 13.97,78.11 13.97,78.74 J11.4
N$57
  Top 0.305: MSOP8.7 14.29,76.53 J11.3
N$58
  Top 0.305: MSOP8.6 14.29,75.88 J11.2
N$59
  Top 0.305: MSOP8.5 13.04,75.22 13.97,74.3 13.97,73.66 J11.1
N$60
  Top 0.305: PAD39.1 R3.2
N$61
  Top 0.305: C12.2 PAD30.1
N$62
  Top 0.305: Q1.1 27.62,84.14 28.57,85.09 31.75,85.09 J13.3
N$63
  Top 0.305: Q1.3 J13.2
N$64
  Top 0.305: Q1.2 27.62,82.23 28.57,81.28 31.75,81.28 J13.1
N$65  (via drill 0.35)
  Top 0.305: v60.3,53.34 60.58,53.61 U5.2
  Bottom 0.305: PAD50.1 57.77,59.05 56.49,57.78 56.49,53.98 57.13,53.34 C16.2 v60.3,53.34
N$66
  Top 0.305: C13.2 11.43,97.16 PAD40.1
N$67  (via drill 0.35)
  Top 0.305: U5.4 64.11,57.24 v64.11,57.78
  Bottom 0.305: v64.11,57.78 62.84,59.05 PAD51.1
N$68  (via drill 0.35)
  Top 0.305: U5.3 67.56,53.61 67.92,53.98 v67.92,57.78
  Bottom 0.305: v67.92,57.78 67.92,58.42 66.66,59.69 PAD52.1
N$69  (via drill 0.3 pad 0.61)
  Top 0.305: TSSOP-1.1 47.6,10.84 v47.6,10.16
  Bottom 0.305: v47.6,10.16 49.51,8.26 49.51,3.81 J16.1
N$70
  Top 0.305: TSSOP-1.2 45.97,11.7 45.7,11.43 45.7,10.79 47.6,8.89 48.24,8.89 49.51,7.62 49.51,6.35 J16.2
N$71
  Top 0.305: TSSOP-1.3 48.59,12.35 48.88,12.06 48.88,10.79 49.51,10.16 49.51,8.89 J16.3
N$72
  Top 0.305: TSSOP-1.4 49.22,12.99 49.51,12.7 49.51,11.43 J16.4
N$73
  Top 0.305: TSSOP-1.5 49.84,13.64 J16.5
N$74
  Top 0.305: TSSOP-1.6 49.84,14.29 J16.6
N$75
  Top 0.305: TSSOP-1.7 49.22,14.95 49.51,15.24 49.51,15.88 50.78,17.14 J16.7
N$76
  Top 0.305: TSSOP-1.8 48.59,15.6 48.88,15.88 48.88,18.41 J16.8
N$77
  Top 0.305: TSSOP-1.9 45.97,16.25 45.7,16.51 45.7,17.14 47.6,19.05 48.24,19.05 49.51,20.32 49.51,21.59 J16.9
N$78  (via drill 0.3 pad 0.61)
  Top 0.305: TSSOP-1.10 47.4,17.58 v47.6,17.78
  Bottom 0.305: v47.6,17.78 49.51,19.68 49.51,24.13 J16.10
N$79  (via drill 0.3 pad 0.61)
  Top 0.305: TSSOP-1.20 41.46,10.36 v41.26,10.16
  Bottom 0.305: v41.26,10.16 39.35,8.26 39.35,3.81 J17.10
N$80
  Top 0.305: TSSOP-1.19 42.9,11.7 43.16,11.43 43.16,10.79 41.26,8.89 40.62,8.89 39.35,7.62 39.35,6.35 J17.9
N$81
  Top 0.305: TSSOP-1.18 40.27,12.35 39.98,12.06 39.98,10.79 39.35,10.16 39.35,8.89 J17.8
N$82
  Top 0.305: TSSOP-1.17 39.65,12.99 39.35,12.7 39.35,11.43 J17.7
N$83
  Top 0.254: TSSOP-1.16 39.02,13.64 J17.6
N$84
  Top 0.254: TSSOP-1.15 39.02,14.29 J17.5
N$85
  Top 0.254: TSSOP-1.14 39.65,14.95 39.35,15.24 39.35,15.88 38.08,17.14 J17.4
N$86
  Top 0.254: TSSOP-1.13 40.27,15.6 39.98,15.88 39.98,17.78 38.08,19.68 J17.3
N$87
  Top 0.254: TSSOP-1.12 42.9,16.25 43.16,16.51 43.16,17.14 41.26,19.05 40.62,19.05 39.35,20.32 39.35,21.59 J17.2
N$88  (via drill 0.3 pad 0.61)
  Top 0.254: TSSOP-1.11 41.26,17.1 v41.26,17.78
  Bottom 0.254: v41.26,17.78 39.35,19.68 39.35,24.13 J17.1
N$89
  Top 0.305: C17.1 PAD53.1
N$90
  Top 0.305: PAD55.1 C17.2
N$91
  Top 0.305: C18.1 PAD54.1
N$92
  Top 0.305: PAD56.1 C18.2
N$93  (via drill 0.3 pad 0.61)
  Top 0.305: PAD59.1 v62.21,92.71
  Bottom 0.305: v62.21,92.71 62.84,93.34 C20.1
N$94  (via drill 0.3 pad 0.61)
  Top 0.305: PAD60.1 v62.21,96.52
  Bottom 0.305: v62.21,96.52 62.84,96.52 C20.2
N$95
  Top 0.305: PAD64.1 C21.2
N$96
  Top 0.305: C22.1 PAD61.1
N$97
  Top 0.305: J21.1 38.08,48.9 39.55,47.42 39.55,43.55 40.19,42.91 TSSOP-2.1
N$98  (via drill 0.35)
  Top 0.305: TSSOP-2.2 42.88,42.27 43.16,42.55 43.16,43.18 v42.52,43.81
  Bottom 0.305: v42.52,43.81 41.26,43.81 J21.2
N$99
  Top 0.254: J21.3 38.08,43.81
  Top 0.305: TSSOP-2.3 40.28,41.62 38.08,43.81
N$100
  Top 0.305: TSSOP-2.4 39.02,40.97 J21.4
N$101
  Top 0.305: TSSOP-2.5 39.02,40.31 J21.5
N$102
  Top 0.305: TSSOP-2.6 40.28,39.66 38.08,37.47 J21.6
N$103  (via drill 0.35)
  Top 0.305: TSSOP-2.7 42.88,39.02 43.16,38.73 43.16,38.1 v42.52,37.47
  Bottom 0.305: v42.52,37.47 41.26,37.47 J21.7
N$104
  Top 0.305: TSSOP-2.8 40.19,38.37 39.55,37.73 39.55,33.86 38.08,32.38 J21.8
N$105
  Top 0.305: J20.8 50.78,48.9 49.31,47.42 49.31,43.55 48.67,42.91 TSSOP-2.16
N$106  (via drill 0.35)
  Top 0.305: TSSOP-2.15 45.98,42.27 45.7,42.55 45.7,43.18 v46.34,43.81
  Bottom 0.305: v46.34,43.81 47.6,43.81 J20.7
N$107
  Top 0.305: TSSOP-2.14 48.58,41.62 50.78,43.81 J20.6
N$108
  Top 0.305: TSSOP-2.13 49.84,40.97 J20.5
N$109
  Top 0.305: TSSOP-2.12 49.84,40.31 J20.4
N$110
  Top 0.305: TSSOP-2.11 48.58,39.66 50.78,37.47 J20.3
N$111  (via drill 0.35)
  Top 0.305: TSSOP-2.10 45.34,39.02 45.06,38.73 45.06,38.1 v45.7,37.47
  Bottom 0.305: J20.2 47.6,37.47 v45.7,37.47
N$112
  Top 0.305: J20.1 50.78,32.38 49.31,33.86 49.31,37.73 48.67,38.37 TSSOP-2.9
N$113
  Top 0.305: U7.4 65.39,5.08 67.29,6.99 R5.2 R5.1 65.77,12.32 U7.5 67.29,13.93 R4.1 67.29,17.14 65.39,19.05 65.39,19.51 U8.1 65.21,19.51 64.11,18.41 59.03,18.41 58.4,17.78 C24.1
N$114
  Top 0.305: U7.2 60.3,7.62 61.58,8.89 61.58,15.24 61.89,15.56 | 61.89,15.56 C24.2 | 61.89,15.56 62.84,16.51 R4.2
N$115
  Top 0.305: C25.2 PAD70.1
N$116
  Top 0.305: MSOP1.1 40.28,77.17 39.35,78.11 39.35,78.74 J27.1
N$117
  Top 0.305: MSOP1.2 39.02,76.53 J27.2
N$118
  Top 0.305: MSOP1.3 39.02,75.88 J27.3
N$119
  Top 0.305: MSOP1.4 40.28,75.22 39.35,74.3 39.35,73.66 J27.4
N$120
  Top 0.305: MSOP1.8 48.58,77.17 49.51,78.11 49.51,78.74 J26.4
N$121
  Top 0.305: MSOP1.7 49.84,76.53 J26.3
N$122
  Top 0.305: MSOP1.6 49.84,75.88 J26.2
N$123
  Top 0.305: MSOP1.5 48.58,75.22 49.51,74.3 49.51,73.66 J26.1
N$124
  Top 0.305: C26.2 PAD72.1
N$125
  Top 0.305: R6.1 PAD80.1
N$126
  Top 0.305: PAD81.1 R6.2
N$127
  Top 0.305: Q2.2 63.16,82.23 64.11,81.28 67.29,81.28 J28.1
N$128
  Top 0.305: Q2.1 63.16,84.14 64.11,85.09 67.29,85.09 J28.3
N$129
  Top 0.305: Q2.3 J28.2
N$130
  Top 0.305: C28.2 46.97,97.16 PAD82.1

## Text on the board
tPlace: Vcc | GND | SDA | SCL | INT_DRDY | Vcc | GND | SDA | SCL | INT_DRDY | Vcc | GND | SCL | SDA | Vcc | GND | SCL | SDA | 1 | 1 | 1 | 1 | C | C | C | C
bPlace: SDA | SDA | SCL | SCL | INT1 | INT1 | INT2 | INT2 | GND | LIS2DW12 | GND | LIS2DW12 | Vdd | Vdd
Milling: v-score